# Altium PCB TuningPCB.PcbDoc
Units mil, origin at the board's own origin, x right, y up, seen from the top; angles counter-clockwise.
Board outline 2000 x 2000 mil, 2 copper layers (Top Layer, Bottom Layer); 4 components, 3 nets, 17 pads, 0 vias.
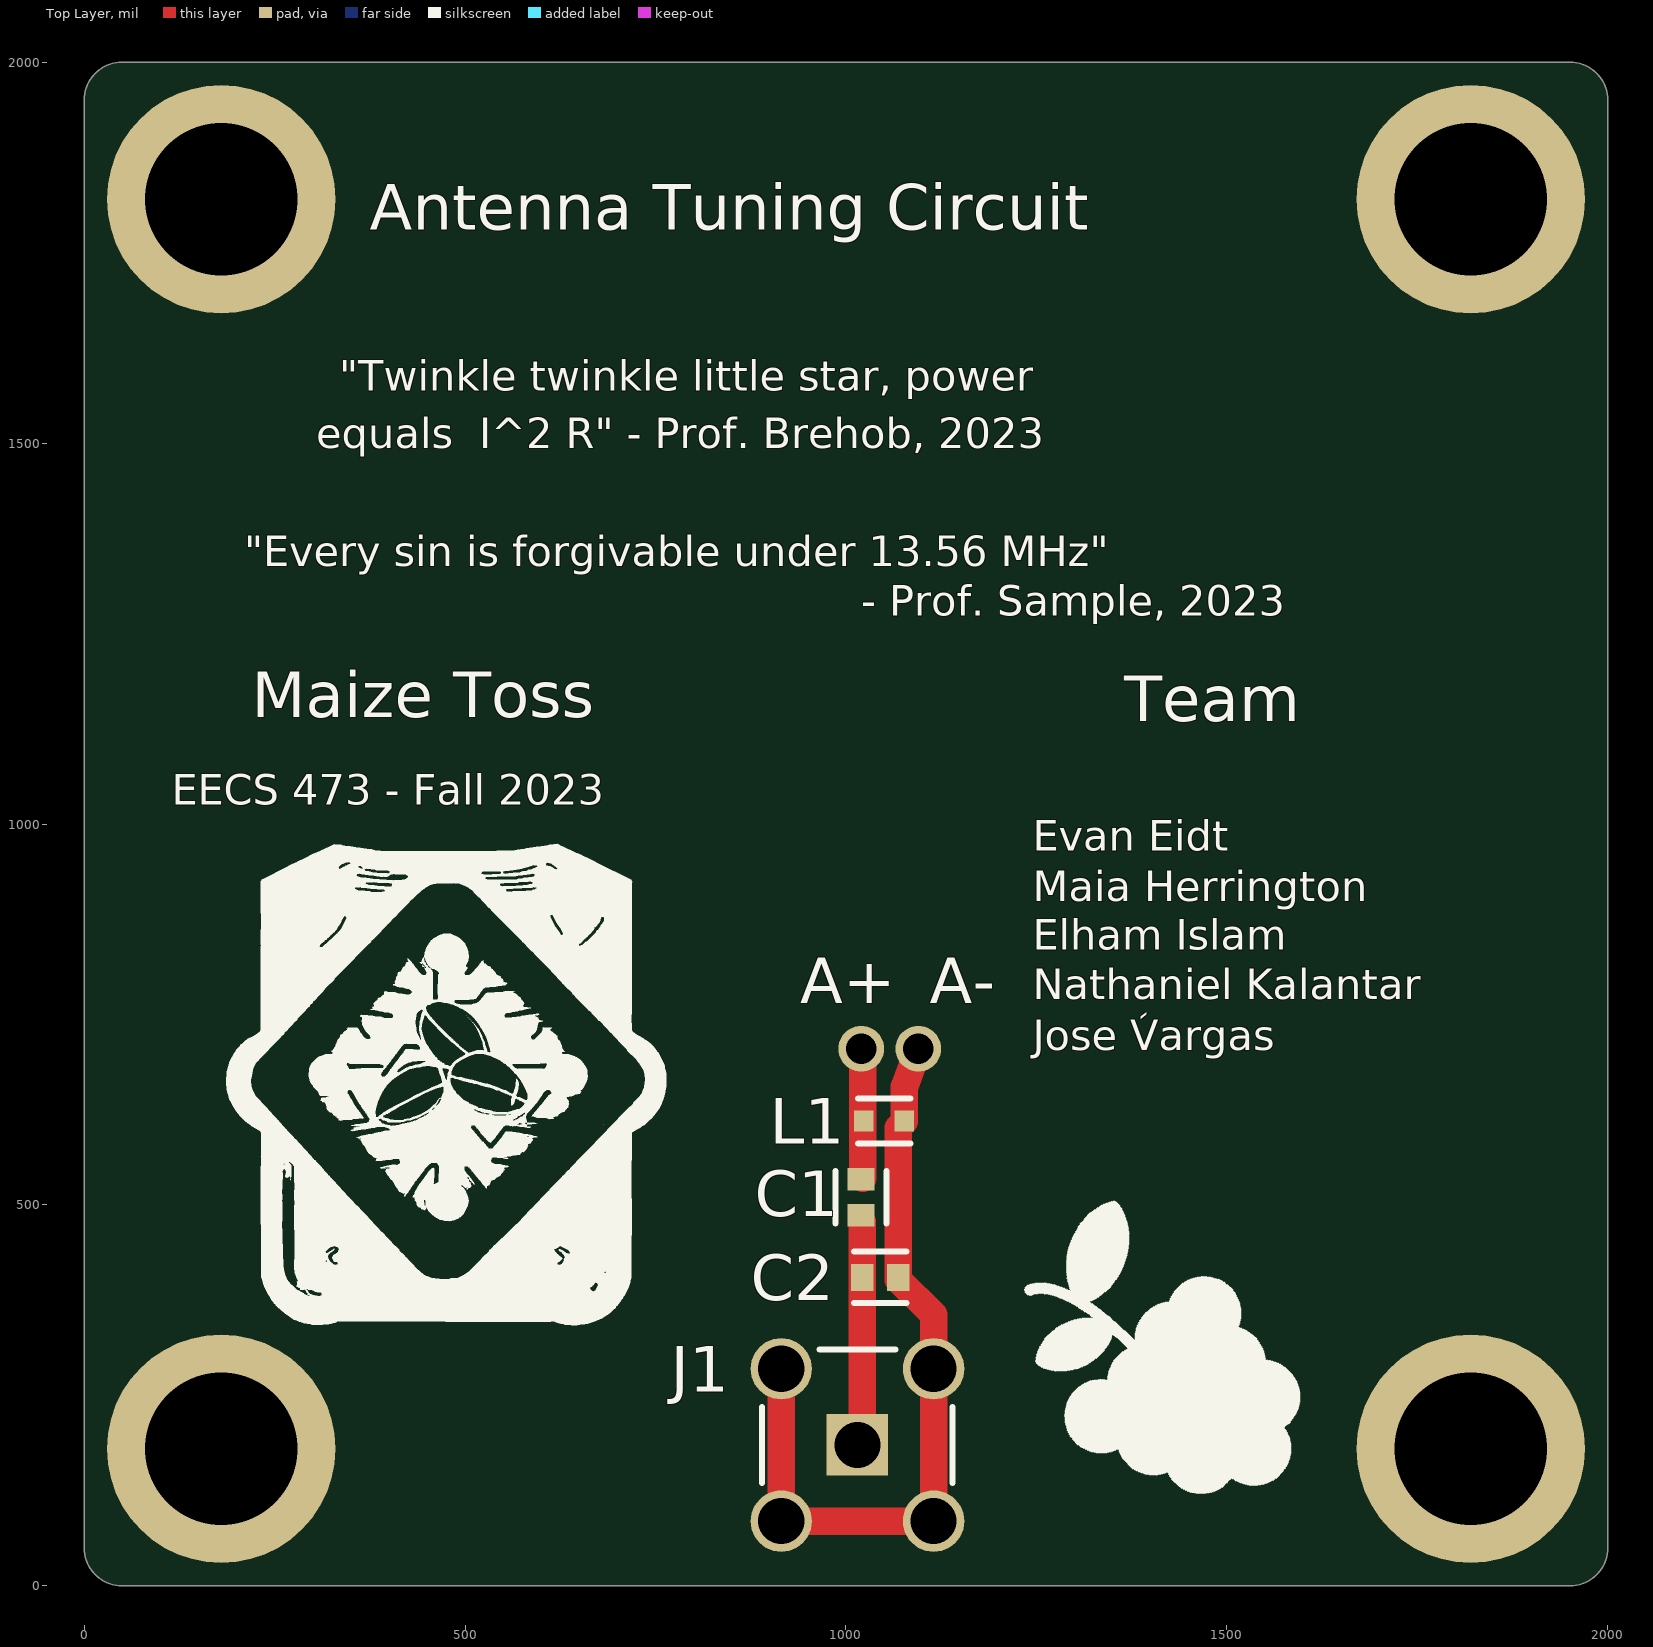
[diagram p0: Top Layer view]
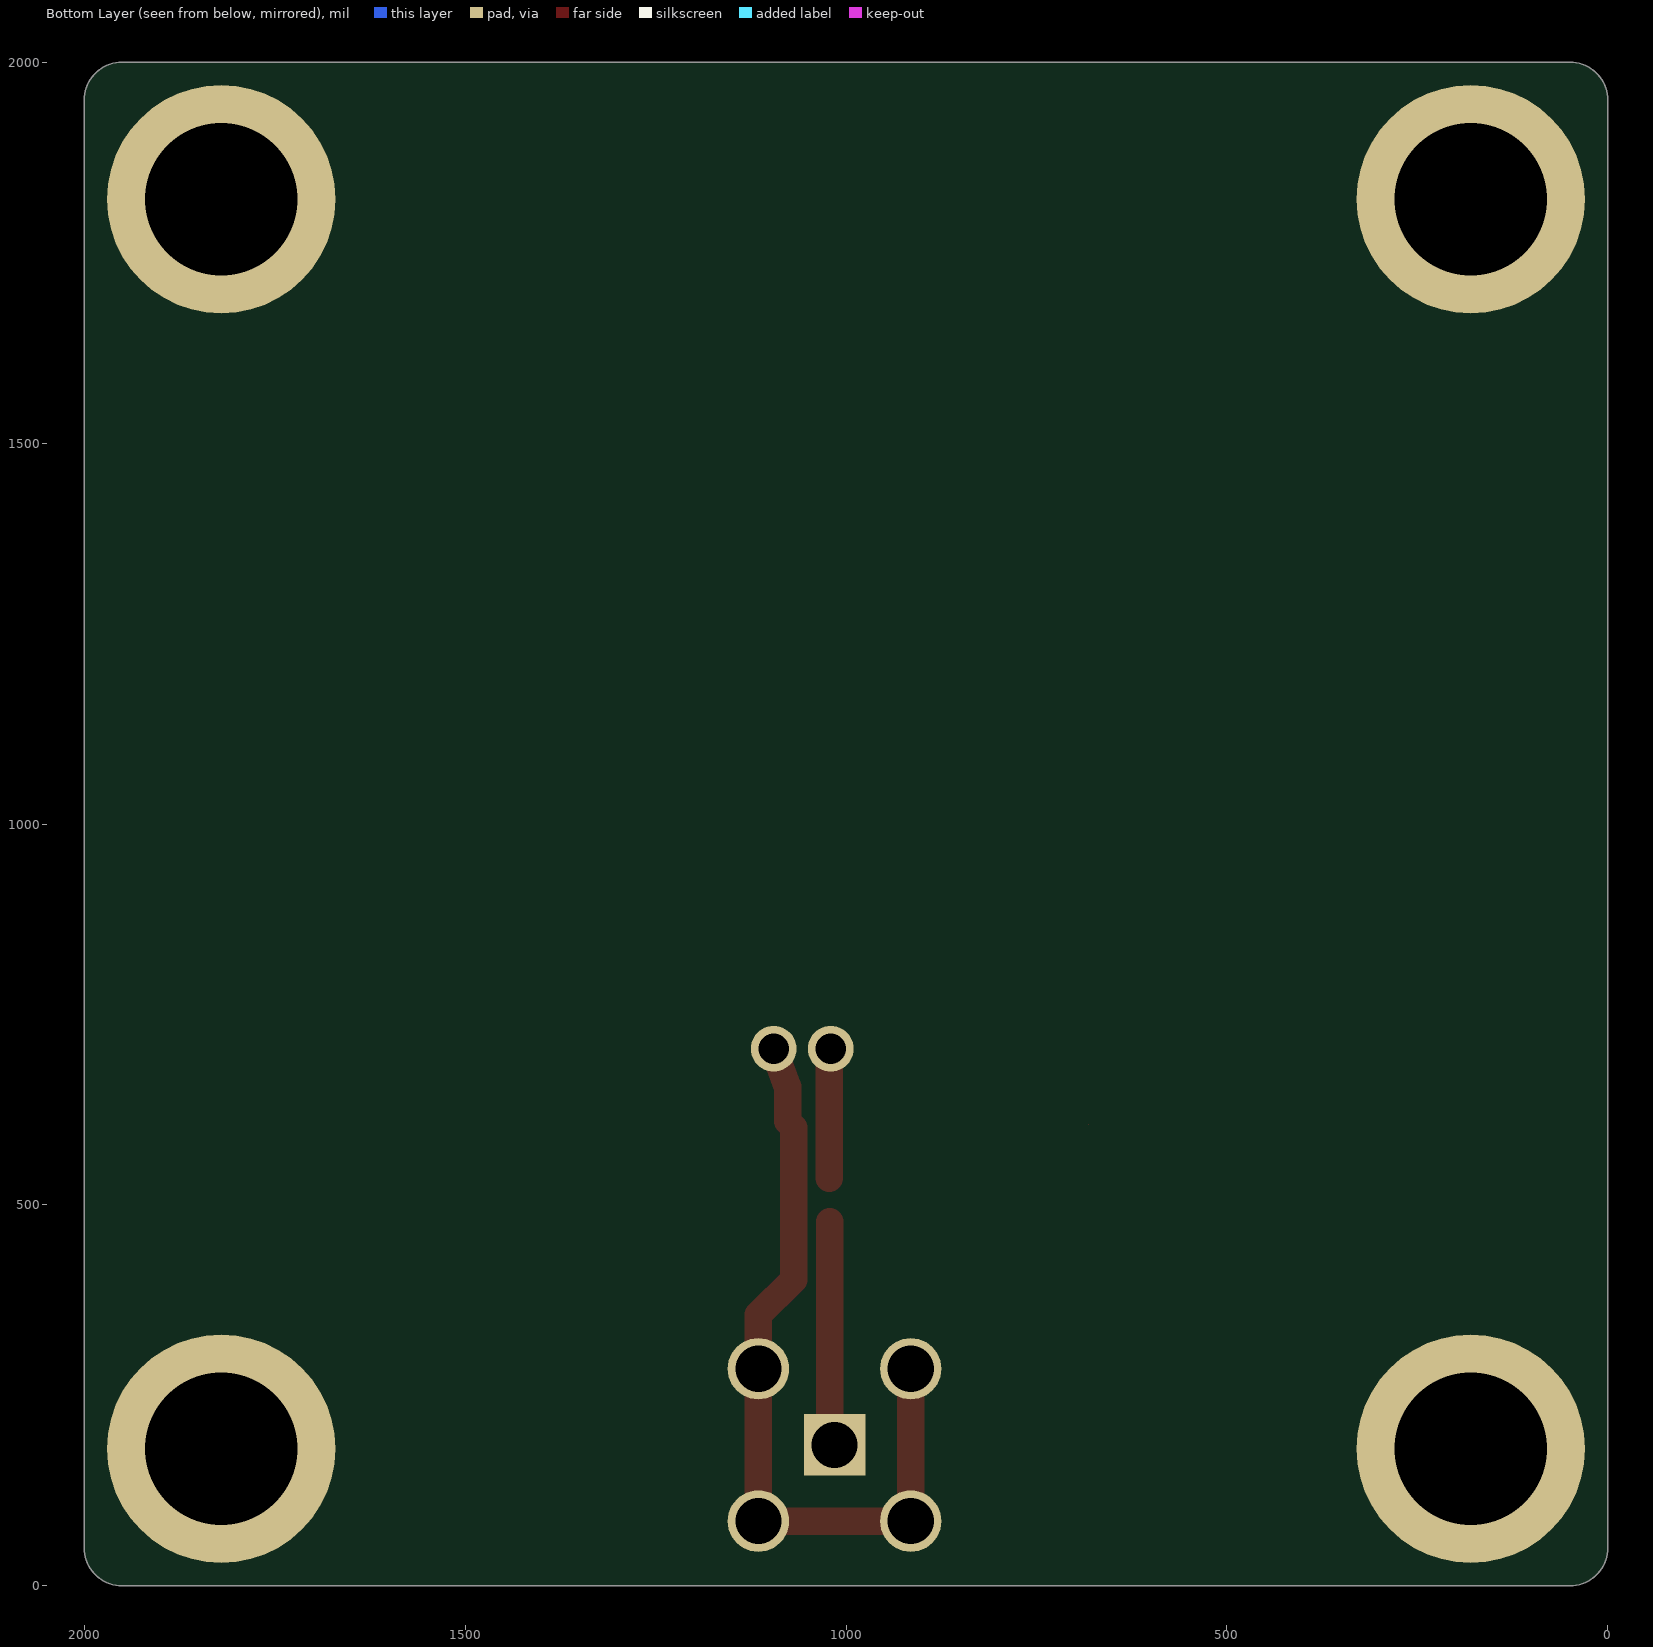
[diagram p1: Bottom Layer view, seen from below]
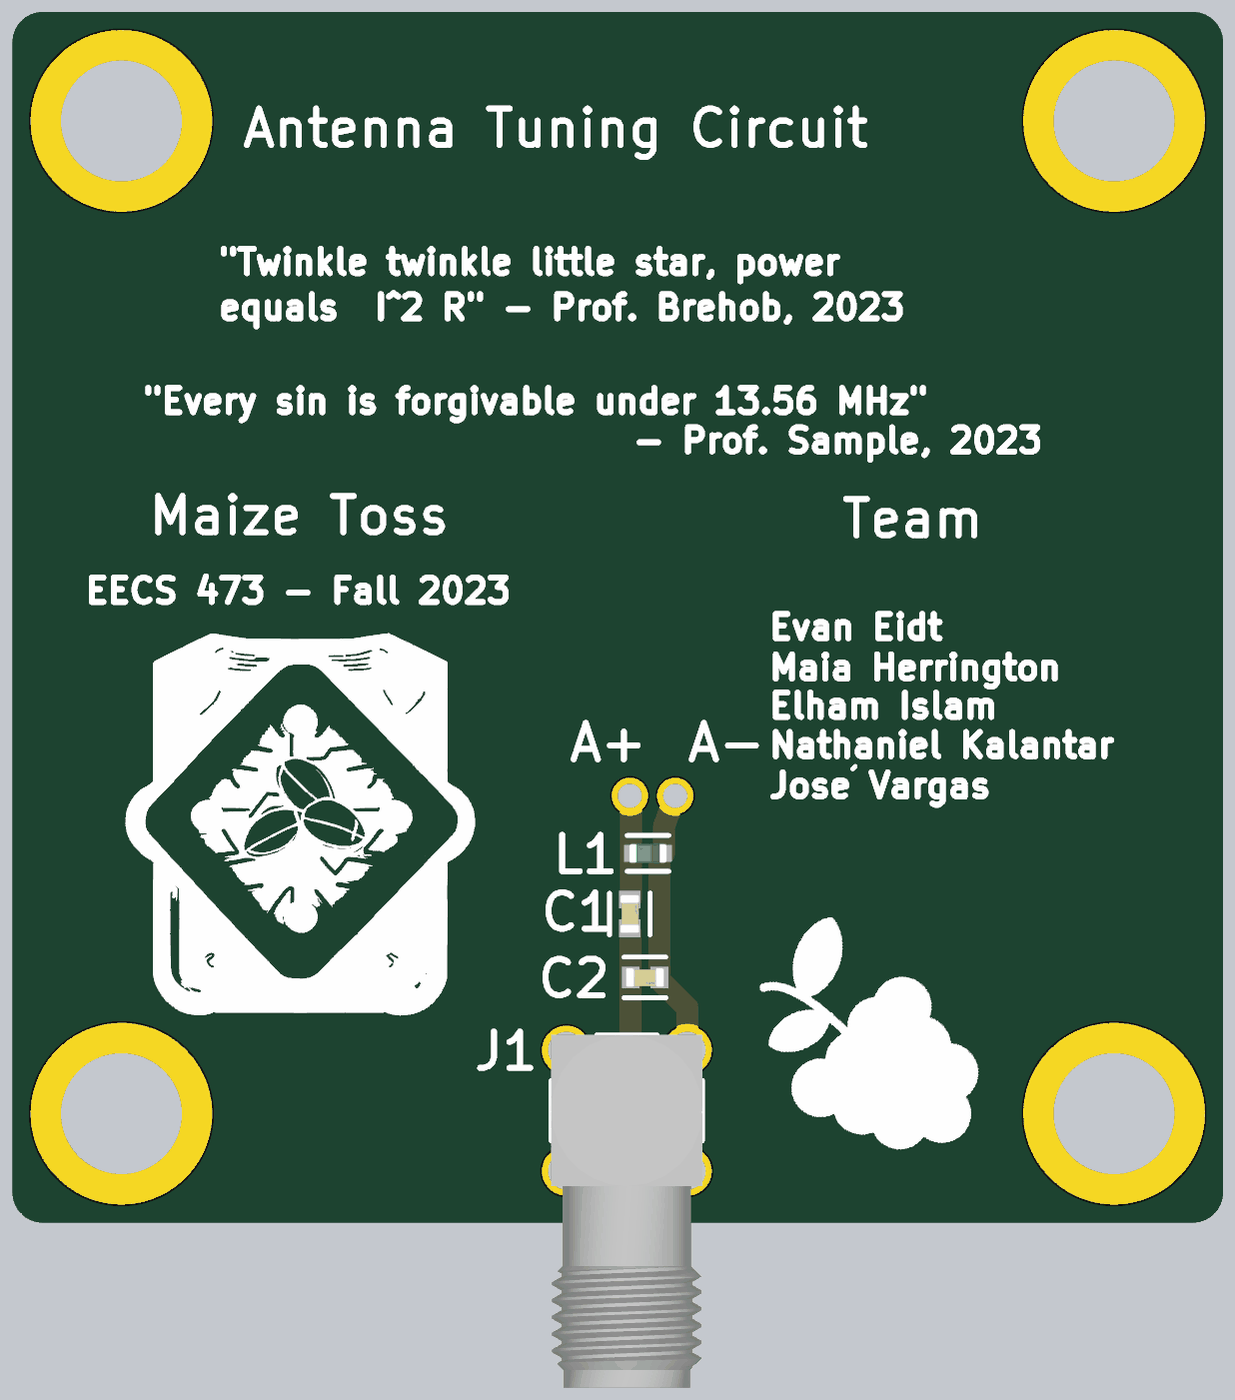
[diagram p2: 3D render of the assembled board from above, using the file's embedded part models]

## Layer stack, top to bottom
Top Solder: solder mask 0.4, Solder Resist, Dk 3.5
Top Layer: signal copper 1.4
Dielectric 1: dielectric 12.6, FR-4, Dk 4.8
Bottom Layer: signal copper 1.4
Bottom Solder: solder mask 0.4, Solder Resist, Dk 3.5

## Board outline
0,50 0,1950 cw(c50,1950) 50,2000 1950,2000 cw(c1950,1950) 2000,1950 2000,50 cw(c1950,50) 1950,0 50,0 cw(c50,50)

## Design rules (kind name [scope] priority, off if disabled: settings)
BoardOutlineClearance [All] p1: gap=7.87 ignorepadtopadclearanceinfootprint=FALSE
Clearance [All] p1: gap=5 ignorepadtopadclearanceinfootprint=FALSE except(9.84: Arc-Hole Track-Hole SMDPad-Hole THPad-Hole Via-Hole Fill-Hole Poly-Hole Region-Hole Text-Hole)
ComponentClearance [All] p1: gap=5 collisioncheckmode=3 verticalgap=5 showdistances=TRUE
DiffPairsRouting DiffPair_DiffPairsRouting [InDifferentialPair ('Antenna')] p1: maxlimit=10 minlimit=10 mostfreqgap=10 toplayer_minwidth=12 toplayer_maxwidth=36.2 toplayer_prefwidth=15 bottomlayer_minwidth=12 bottomlayer_maxwidth=36.2 bottomlayer_prefwidth=15 maxuncoupledlength=500
DiffPairsRouting [All] p2: maxlimit=10 minlimit=5 mostfreqgap=5 toplayer_minwidth=5 toplayer_maxwidth=1000 toplayer_prefwidth=5 bottomlayer_minwidth=5 bottomlayer_maxwidth=1000 bottomlayer_prefwidth=5 maxuncoupledlength=500
Height [All] p1: minheight=0 maxheight=71497.94 prefheight=500
HoleSize [All] p1: absolutevalues=TRUE maxlimit=248.03 minlimit=11.81 maxpercent=80.000 minpercent=20.000
HoleToHoleClearance [All] p1: gap=9.84 allowstackedmicrovias=FALSE
MatchedLengths DiffPair_MatchedLengths [InDifferentialPair ('Antenna')] p1: tolerance=1000 checknetsindiffpair=FALSE checkdiffpairvsdiffpair=TRUE checkxsignals=TRUE checkothers=TRUE
MinimumAnnularRing [All] p1: minimumring=3
MinimumSolderMaskSliver [All] p1: minsoldermaskwidth=0
PlaneClearance [All] p1: clearance=5
PlaneConnect PlaneConnectPowerPads [InPadClass('PowerPads')] p1: planeconnectstyle=Direct reliefexpansion=20 reliefentries=4 reliefconductorwidth=10 reliefairgap=10
PlaneConnect [All] p2: pad.planeconnectstyle=Relief pad.reliefexpansion=11.81 pad.reliefentries=4 pad.reliefconductorwidth=5 pad.reliefairgap=5 via.planeconnectstyle=Direct via.reliefexpansion=11.81 via.reliefentries=4 via.reliefconductorwidth=5 via.reliefairgap=5
PolygonConnect PolygonConnectPowerPads [All vs (InPadClass('PowerPads'))] p1: connectstyle=Direct reliefconductorwidth=10 reliefentries=4 polygonreliefangle="90 Angle" airgapwidth=10
PolygonConnect [All] p2: thpad.connectstyle=Relief thpad.reliefconductorwidth=5 thpad.reliefentries=4 thpad.polygonreliefangle="90 Angle" thpad.airgapwidth=5 smdpad.connectstyle=Relief smdpad.reliefconductorwidth=5 smdpad.reliefentries=4 smdpad.polygonreliefangle="90 Angle" smdpad.airgapwidth=5 via.connectstyle=Direct via.reliefconductorwidth=5 via.reliefentries=4 via.polygonreliefangle="90 Angle" via.airgapwidth=5
RoutingVias [All] p1: holewidth=11.81 width=23.62 viastyle="Through Hole" minholewidth=11.81 minwidth=23.62 maxholewidth=23.62 maxwidth=259.84
SilkToSilkClearance [All] p1: silktosilkclearance=0
SilkToSolderMaskClearance [IsPad] p1: minsilkscreentomaskgap=5 clearancetoexposedcopper=TRUE
SolderMaskExpansion [All] p1: expansion=2.95 istentingtop=FALSE
Width [All] p1: maxlimit=1000 minlimit=5 preferedwidth=5 minimp=50.000000 maximp=50.000000 favimp=50.000000
20 further rules are at their usual default settings.

## Classes and differential pairs
net class "Antenna -": Antenna_N
net class "Antenna +": Antenna_P
differential pair Antenna: +Antenna_P -Antenna_N

## Components (designator, comment, footprint, x,y, rotation, side; value= is the part's Value field where it differs from the comment)
C1 "1uF" FP-C0603C-CF-MFG 1020,510 r270 top value="0.10 μF"
C2 "1uF" FP-C0603C-CF-MFG 1045,405 r180 top value="0.10 μF"
J1 "731000114" MOLX-731000114_V 1015,185 r90 top
L1 "0.068uH" FP-LQG18HH_00-MFG 1050,610 r180 top

## Footprints (in the part's own frame and the unit in brackets; to place one, negate y for a bottom-side part, rotate by r counter-clockwise, add the part's x,y. Pads: shape width x height; smd on the part's side, far side on the other; paste and mask are expansions set on the pad)
FP-C0603C-CF-MFG [mm]
  rect 0.75x0.9 smd paste+0 mask+0: 1(-0.6,0) 2(0.6,0)
  silkscreen extent -0.87,-0.85 0.88,0.85, body extent -1.2,-0.6 1.2,0.6, height 0.25
FP-LQG18HH_00-MFG [mm]
  rect 0.65x0.7 smd paste+0 mask+0: 1(-0.675,0) 2(0.675,0)
  silkscreen extent -0.87,-0.75 0.87,0.75, body extent -1.1,-0.58 1.1,0.58, height 0.25
MOLX-731000114_V [mm] "Connector, 5-Leads, Body 14.8x6.35mm, Pitch 2.54mm"
  rect 2.05x2.05 hole 1.54: 1(0,0)
  round 2.05 hole 1.54: 2(-2.54,2.54) 3(-2.54,-2.54) 4(2.54,-2.54) 5(2.54,2.54)
  silkscreen extent -1.26,-3.17 3.17,3.17, body extent -11.62,-3.17 3.18,3.18, height 9.57

## Part data
C1 C2: library part CMP-2006-03061-2, "CAP CER 0.1UF 50V X7R 0603", Capacitance="0.10 μF", Manufacturer=KEMET, Manufacturer Part Number=C0603C104K5RACTU, Package=C0603C-CF, Temperature="-55°C to +125°C", Temperature Characteristic=X7R, Temperature Coefficient=30ppm/°C, Temperature Range High=+125°C, Temperature Range Low=-55°C, Tolerance=0.1, Voltage Rating="50 V", Automotive=Yes, Automotive Grade="Grade 1", Category=Cap, ComponentLink2Description=Datasheet, ComponentLink2URL=https://api.kemet.com/component-edge/download/datasheet/C0603C100J5GACAUTO.pdf, Device Class L1="Passive Components", Device Class L2=Capacitors, Device Class L3="Ceramic Capacitors", Digikey Description="CAP CER 0.1UF 50V X7R 0603", Height=0.87mm, Lead Free=Yes, Material=Ceramic, Octopart=https://octopart.com/c0603c104k5ractu-kemet-139244, RoHS=TRUE
J1: library part CMP-2000-05487-1, "SMA Right-Angle PCB Jack Receptacle, Brass Body, Gold Plated, 50 Ohm, 5-Pin THD, RoHS, Tray", Manufacturer=Molex, Package Description="5-Pin Through Hole Device, Body 14.8 x 6.35 mm, Pitch 2.54 mm", Datasheet URL=http://www.molex.com/webdocs/datasheets/pdf/en-us/0731000114_RF_COAX_CONNECTORS.pdf, Datasheet Version=09/2016, Manufacturer URL=http://www.molex.com/, Mounting Technology=ThroughHole, Package Reference=731000114, Package URL=http://www.molex.com/pdm_docs/sd/731000114_sd.pdf
L1: library part CMP-06042-006563-1, "Multilayer type RF Inductor 68nH ±5% 0.8Ω 400mA 0603", Case Code (Imperial)=0603, Case Code (Metric)=1608, Current Rating=300mA, DC Resistance (DCR)=800mR, Inductance=68nH, Inductance Tolerance=5%, Max Operating Temperature=85°C, Min Operating Temperature=-55°C, Package Quantity=4000, Self Resonant Frequency=1GHz, Test Frequency=100MHz, Case/Package=0603, Core Material=Air, DC Current=300mA, Depth=0.95mm, Height=0.031inch, Lead Free="Lead Free", Length=0.063inch, Max DC Current=300mA, Military Standard=Not, Mount="Surface Mount", Number of Pins=2, Packaging="Tape and Reel", Q Factor=12, Radiation Hardening=No, REACH SVHC="No SVHC", Shielding=Unshielded, Termination=SMD/SMT, Tolerance=5%, Width=0.8mm

## Free pads (board coordinates)
  round 60 hole 40: 1(1020,705) 2(1095,705)
  round 300 hole 200: 3(180,180) 3(180,1820) 3(1820,180) 3(1820,1820)

## Nets (pads, with @x,y where several pads share a name; then routed paths per layer and width w, separated by ;. In a path a pad name is that pad's centre, name@x,y a point inside that pad or via, vN(x,y) a via of type N, cw(c..) or ccw(c..) an arc to the next point about the centre after c; other vN are vias at no path point)
Antenna_N: C2.1 J1.2 J1.3 J1.4 J1.5 L1.1 pad.2 | length 1033.6
  Top Layer w15: C2.1@1068.62,402.05 C2.1
  Top Layer w36.2: J1.5 J1.2 J1.3 J1.4 1115,355.67 C2.1@1068.62,402.05 ; C2.1 L1.1@1068.62,601.06 ; L1.1 1076.57,655.04 pad.2
Antenna_P: C1.1 L1.2 pad.1 | length 176.4
  Top Layer w10: C1.1@1018.43,535.2 C1.1
  Top Layer w15: C1.1 C1.1@1021.71,535.33 ; pad.1 pad.1@1021.71,703.29 ; L1.2@1021.71,608.29 L1.2 L1.2@1021.71,611.71
  Top Layer w36.2: C1.1@1021.71,535.33 L1.2@1021.71,608.29 ; L1.2@1021.71,611.71 pad.1@1021.71,703.29
NetC1_2: C1.2 C2.2 J1.1 | length 302.5
  Top Layer w5: C1.2@1016.38,482.76 C1.2@1021.38,477.76
  Top Layer w10: J1.1 J1.1@1021.38,191.38
  Top Layer w36.2: J1.1@1021.38,191.38 C2.2 C1.2@1021.38,477.76

## Other copper
Top Layer:
  region: 363.71,740.91 363.49,741.13 363.71,741.36 363.94,741.13
  region: 681.58,605.71 681.81,605.48 681.58,605.26 681.36,605.48

## Silkscreen, mask and mechanical layers (free items; w line width, h text height)
Top Overlay:
  drawing of 3 lines, arcs and shapes, not listed
  text "Antenna Tuning Circuit" at 375,1779.99 h60
  text "\"Twinkle twinkle little star, power" at 335,1568.35 h40
  text "equals  I^2 R\" - Prof. Brehob, 2023" at 305,1493.33 h40
  text "\"Every sin is forgivable under 13.56 MHz\"" at 210,1338.33 h40
  text "- Prof. Sample, 2023" at 1020,1273.33 h40
  text "Maize Toss" at 220,1140 h60
  text "Team" at 1365,1135 h60
  text "EECS 473 - Fall 2023" at 115,1025 h40
  text "Evan Eidt" at 1245,965 h40
  text "Maia Herrington" at 1245,898.33 h40
  text "Elham Islam" at 1245,835 h40
  text "Nathaniel Kalantar" at 1245,770 h40
  text "A+" at 940.03,765 h60
  text "A-" at 1110,765 h60
  text "`" at 1420,740 h30 r90
  text "Jose Vargas" at 1245,703.33 h40
Mechanical 1:
  lines w10: 0,50 ccw(c50,50) 50,0 1950,0 ccw(c1950,50) 2000,50 2000,1950 ccw(c1950,1950) 1950,2000 50,2000 ccw(c50,1950) 0,1950 0,1610 0,50
Top Assembly:
  lines w10: -20,60 0,0 ; -20,1940 0,2000 ; -10,0 10,0 ; -10,2000 10,2000 ; 0,719.09 0,0 ; 0,1280.91 0,2000 ; 0,1990 0,2010 ; 20,60 0,0 ; 20,1940 0,2000 ; 60,1980 0,2000 ; 60,2020 0,2000 ; 719.09,2000 0,2000 ; 1280.91,2000 2000,2000 ; 1940,1980 2000,2000 ; 1940,2020 2000,2000 ; 2000,1990 2000,2010
  text "2000 (mil)" at 729.09,1964.01 h60
  text "2000 (mil)" at 35.99,729.09 h60 r90